# EAGLE board CAN-Bus Breakout (EAGLE 7.2.0)
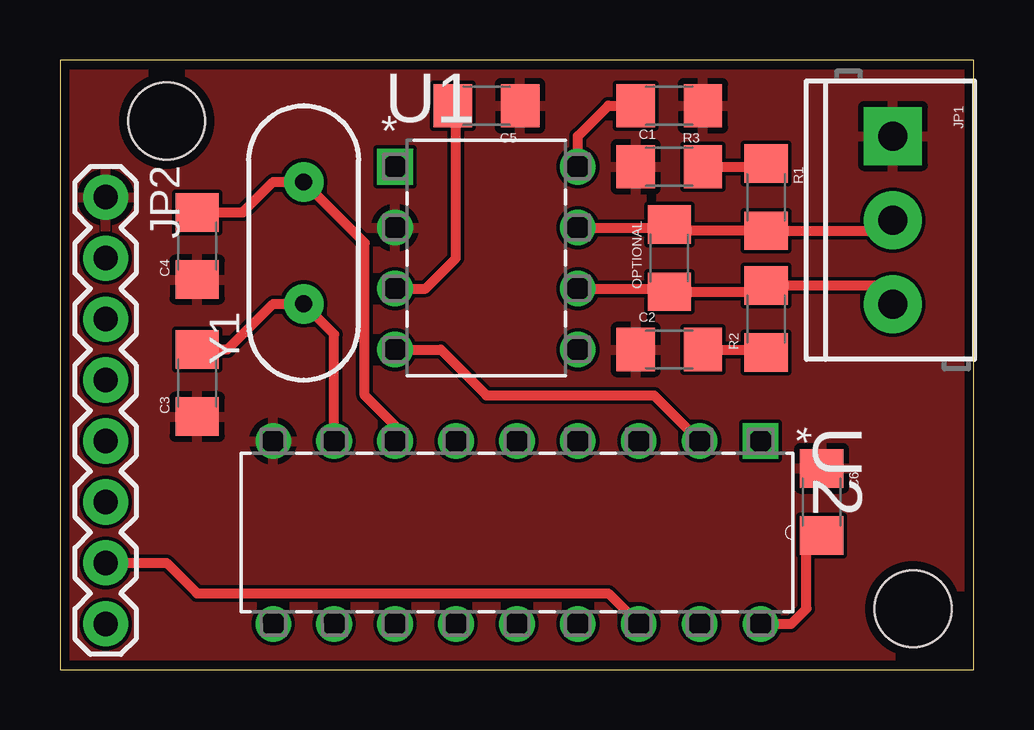
[diagram p0: board, top side]
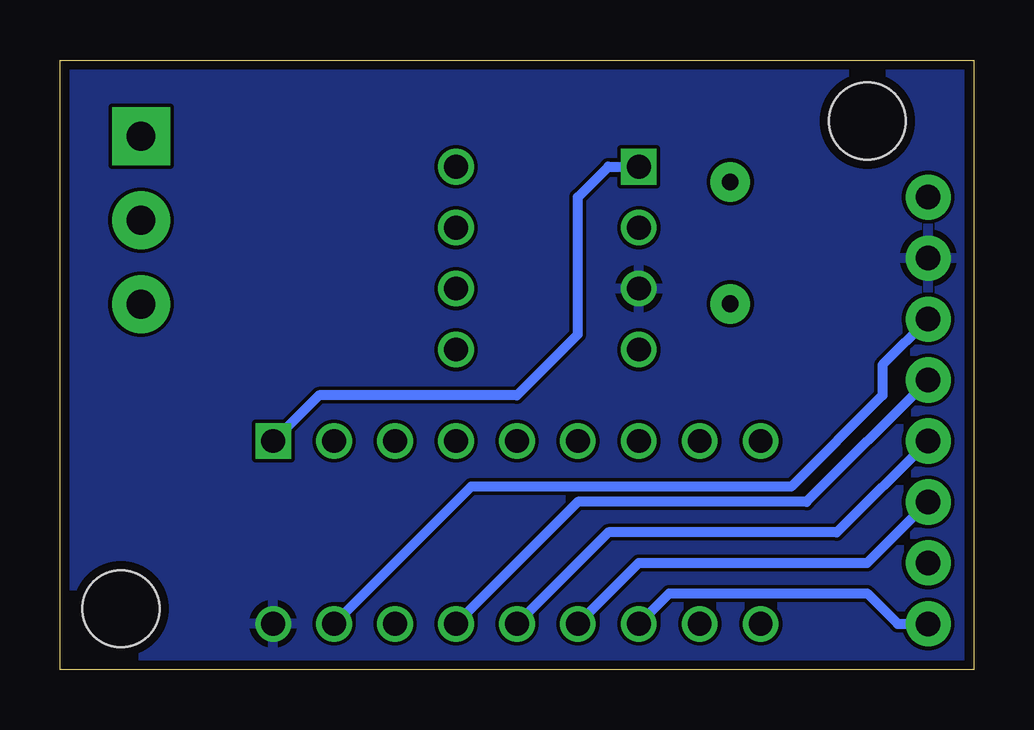
[diagram p1: board, bottom side, seen from below]

Size 38.1 x 25.4 mm. Coordinates in mm from the lower left corner, seen from the top.
Outline: 0,0 38.1,0 38.1,25.4 0,25.4 0,0
Copper layers (1*16): Top 0.0356mm / dielectric 1.5011mm / Bottom 0.0356mm
Design rules "LaenPCBOrder *": minimum track width 6mil, minimum drill 13mil, track to track 6mil, track to pad 6mil, pad to pad 6mil, via to via 6mil, smd to smd 6mil, copper to edge 15mil, drill to drill 6mil, minimum pad ring 7mil, minimum via ring 7mil, stop-mask expansion 3mil, vias tented up to drill 0mil, thermal gap 10mil
Holes 3.2 mm at 35.56,2.54 4.45,22.86

## Footprints (pad centres in the part's own frame; a part is rotated, then mirrored left to right if it is on the bottom)
1206 = smd 1.6 x 1.8: 1 -1.4,0; 2 1.4,0
SCREWTERMINAL-3.5MM-3 = drill 1.2 pad 2.413 square: 1 0,0 | drill 1.2 pad 2.413: 2 3.5,0; 3 7,0
1X08_ROUND = drill 1.016 pad 1.88: 1 0,0; 2 2.54,0; 3 5.08,0; 4 7.62,0; 5 10.16,0; 6 12.7,0; 7 15.24,0; 8 17.78,0
DIP254P762X432-8 = drill 0.991 square: 1 -7.62,7.62 | drill 0.991: 2 -7.62,5.08; 3 -7.62,2.54; 4 -7.62,0; 5 0,0; 6 0,2.54; 7 0,5.08; 8 0,7.62
DIP254P762X432-18 = drill 0.991 square: 1 -7.62,20.32 | drill 0.991: 2 -7.62,17.78; 3 -7.62,15.24; 4 -7.62,12.7; 5 -7.62,10.16; 6 -7.62,7.62; 7 -7.62,5.08; 8 -7.62,2.54; 9 -7.62,0; 10 0,0; 11 0,2.54; 12 0,5.08; 13 0,7.62; 14 0,10.16; 15 0,12.7; 16 0,15.24; 17 0,17.78; 18 0,20.32
HC49US = drill 0.7 pad 1.651: 1 -2.54,0; 2 2.54,0

## Placement (x,y rotation side)
C1  560 pF  [1206]  25.4,20.95 0 top
C2  560 pF  [1206]  25.4,13.34 0 top
C3  22 pF  [1206]  5.71,11.94 90 top
C4  22 pF  [1206]  5.71,17.65 90 top
C5  0.1 uF  [1206]  17.78,23.5 180 top
C6  0.1 uF  [1206]  31.75,6.99 270 top
FRAME1  FRAME-LETTER  [CREATIVE_COMMONS]  20.32,-10.16 0 top  (outside the outline)
JP1  [SCREWTERMINAL-3.5MM-3]  34.72,22.23 270 top
JP2  [1X08_ROUND]  1.91,19.68 270 top
OPTIONAL  60  [1206]  25.4,17.14 90 top
R1  100  [1206]  29.44,19.68 270 top
R2  100  [1206]  29.44,14.61 90 top
R3  4.7K  [1206]  25.4,23.5 180 top
U1  MCP2551-E/P  [DIP254P762X432-8]  21.59,13.34 0 top
U2  MCP2515-I/P  [DIP254P762X432-18]  8.89,1.91 270 top
Y1  16 MHz  [HC49US]  10.16,17.78 90 top

## Library data of the parts
C1-C6 OPTIONAL R1-R3 = SparkFun-Passives
FRAME1 = SparkFun-Aesthetics
JP1 JP2 = SparkFun-Connectors
U1 = Microchip_By_element14_Batch_1; MPN: MCP2551-E/P; OC_FARNELL: 1439745; OC_NEWARK: 69K7603; PACKAGE: DIP-8; SUPPLIER: Microchip
U2 = Microchip_By_element14_Batch_1; DESCRIPTION: CAN CONTRL; MPN: MCP2515-I/P; OC_FARNELL: 1439391; OC_NEWARK: 61K2945; PACKAGE: PDIP-18; SUPPLIER: MICROCHIP
Y1 = SparkFun-FreqCtrl

## Nets
CAN_CS: JP2.7 U2.16
CAN_RX: U1.4 U2.2
CAN_TX: U1.1 U2.1
CANH: JP1.2 OPTIONAL.2 R1.2 U1.7
CANL: JP1.3 OPTIONAL.1 R2.2 U1.6
GND: C1.1 C2.1 C3.1 C4.1 C5.1 C6.1 JP1.1 JP2.1 R3.1 U1.2 U2.9
INT: JP2.8 U2.12
MISO: JP2.4 U2.15
MOSI: JP2.5 U2.14
N$1: R3.2 U1.8
N$2: C1.2 R1.1
N$4: C2.2 R2.1
OSC1: C3.2 U2.8 Y1.1
OSC2: C4.2 U2.7 Y1.2
RESET: JP2.3 U2.17
SCK: JP2.6 U2.13
VCC: C5.2 C6.2 JP2.2 U1.3 U2.18

## Tracks (layer width: path | path; a pad name or v marks a point on that pad's centre or on a via)
CAN_CS
  Top 0.406: JP2.7 4.45,4.45 5.71,3.17 22.86,3.17 U2.16
CAN_RX
  Top 0.406: U1.4 15.88,13.34 17.78,11.43 24.77,11.43 U2.2
CAN_TX
  Bottom 0.406: U1.1 15.24,20.95 16.51,19.68 16.51,13.97 19.05,11.43 27.3,11.43 U2.1
CANH
  Top 0.406: U1.7 25.27,18.41 OPTIONAL.2 25.66,18.29 R1.2 34.54,18.29 JP1.2
CANL
  Top 0.406: U1.6 25.27,15.88 OPTIONAL.1 29.18,15.74 R2.2 33.94,16 JP1.3
GND
  pour Top: 0,0 99.69,0 100.33,80.01 0,80.01
INT
  Bottom 0.406: U2.12 12.7,3.17 4.45,3.17 3.17,1.91 JP2.8
MISO
  Bottom 0.406: U2.15 16.51,6.99 6.99,6.99 JP2.4
MOSI
  Bottom 0.406: U2.14 15.24,5.71 5.71,5.71 JP2.5
N$1
  Top 0.406: U1.8 21.59,22.23 22.86,23.5 R3.2
N$2
  Top 0.406: C1.2 29.31,20.95 R1.1
N$4
  Top 0.406: C2.2 29.31,13.34 R2.1
OSC1
  Top 0.406: U2.8 11.43,13.97 Y1.1 8.89,15.24 6.99,13.34 C3.2
OSC2
  Top 0.406: U2.7 13.97,10.16 12.7,11.43 12.7,17.78 Y1.2 8.89,20.32 7.62,19.05 C4.2
RESET
  Bottom 0.406: JP2.3 3.81,12.7 3.81,11.43 7.62,7.62 20.95,7.62 U2.17
SCK
  Bottom 0.406: U2.13 13.97,4.45 4.45,4.45 JP2.6
VCC
  Top 0.406: U2.18 30.48,1.91 31.11,2.54 31.11,4.95 C6.2 | U1.3 15.24,15.88 16.51,17.14 16.51,23.36 C5.2
  pour Bottom: 0,0 99.69,0 100.33,80.01 0,80.01

## Text on the board
tDocu: 0.1 uF | 4.7K / Ohm | 560 pF | 100 / Ohm | 22 pF | 16 MHz | MCP2551 | 60 / Ohm | 100 / Ohm | 560 pF | 22 pF | 0.1 uF | MCP2515
bDocu: GND | GND | CANH | VCC | RESET | CANL | MISO | MOSI | CAN Bus Breakout Board / +5V Logic / Rev: 000 | SCK | CS | INT